# Altium PCB XIAO-HAT.PcbDoc
Units mm, origin at the board's own origin, x right, y up, seen from the top; angles counter-clockwise.
Board outline 18 x 21 mm, 2 copper layers (Top Layer, Bottom Layer); 12 components, 18 nets, 46 pads, 6 vias.
Unrouted connection lines stored in the file: 9.
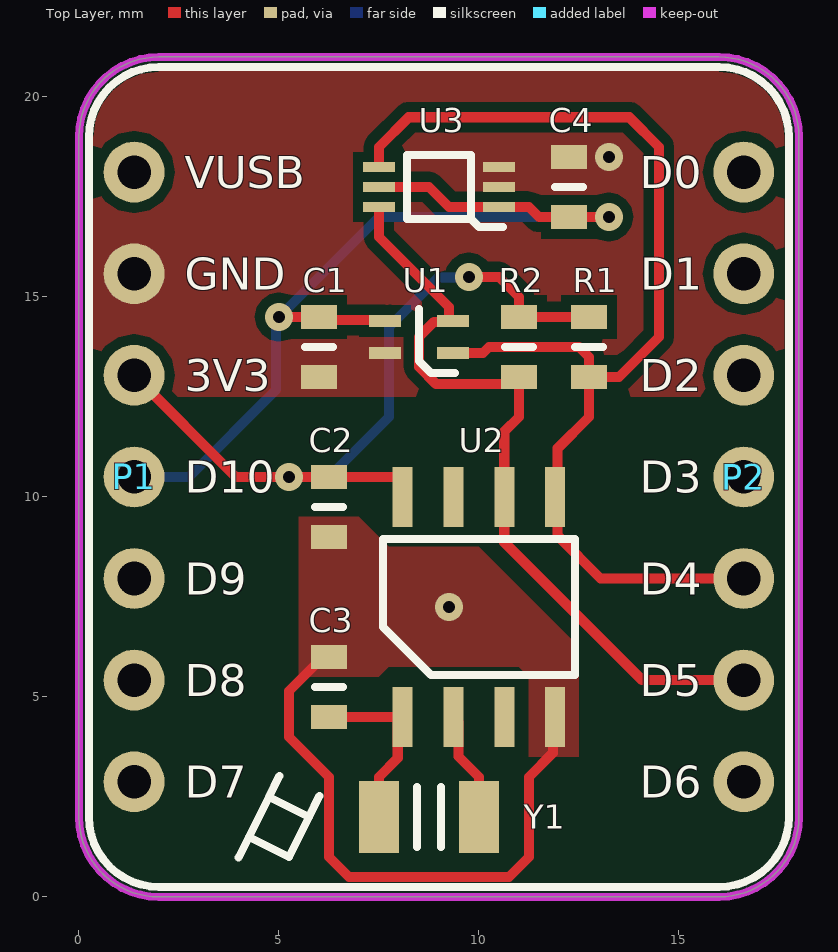
[diagram p0: Top Layer view]
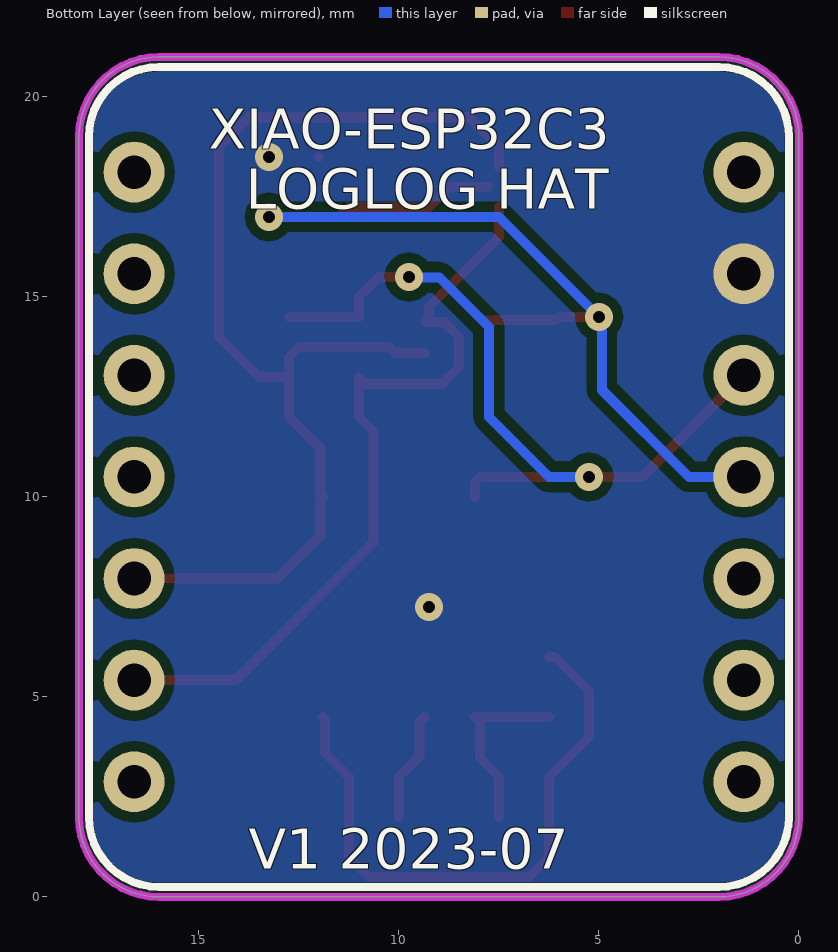
[diagram p1: Bottom Layer view, seen from below]
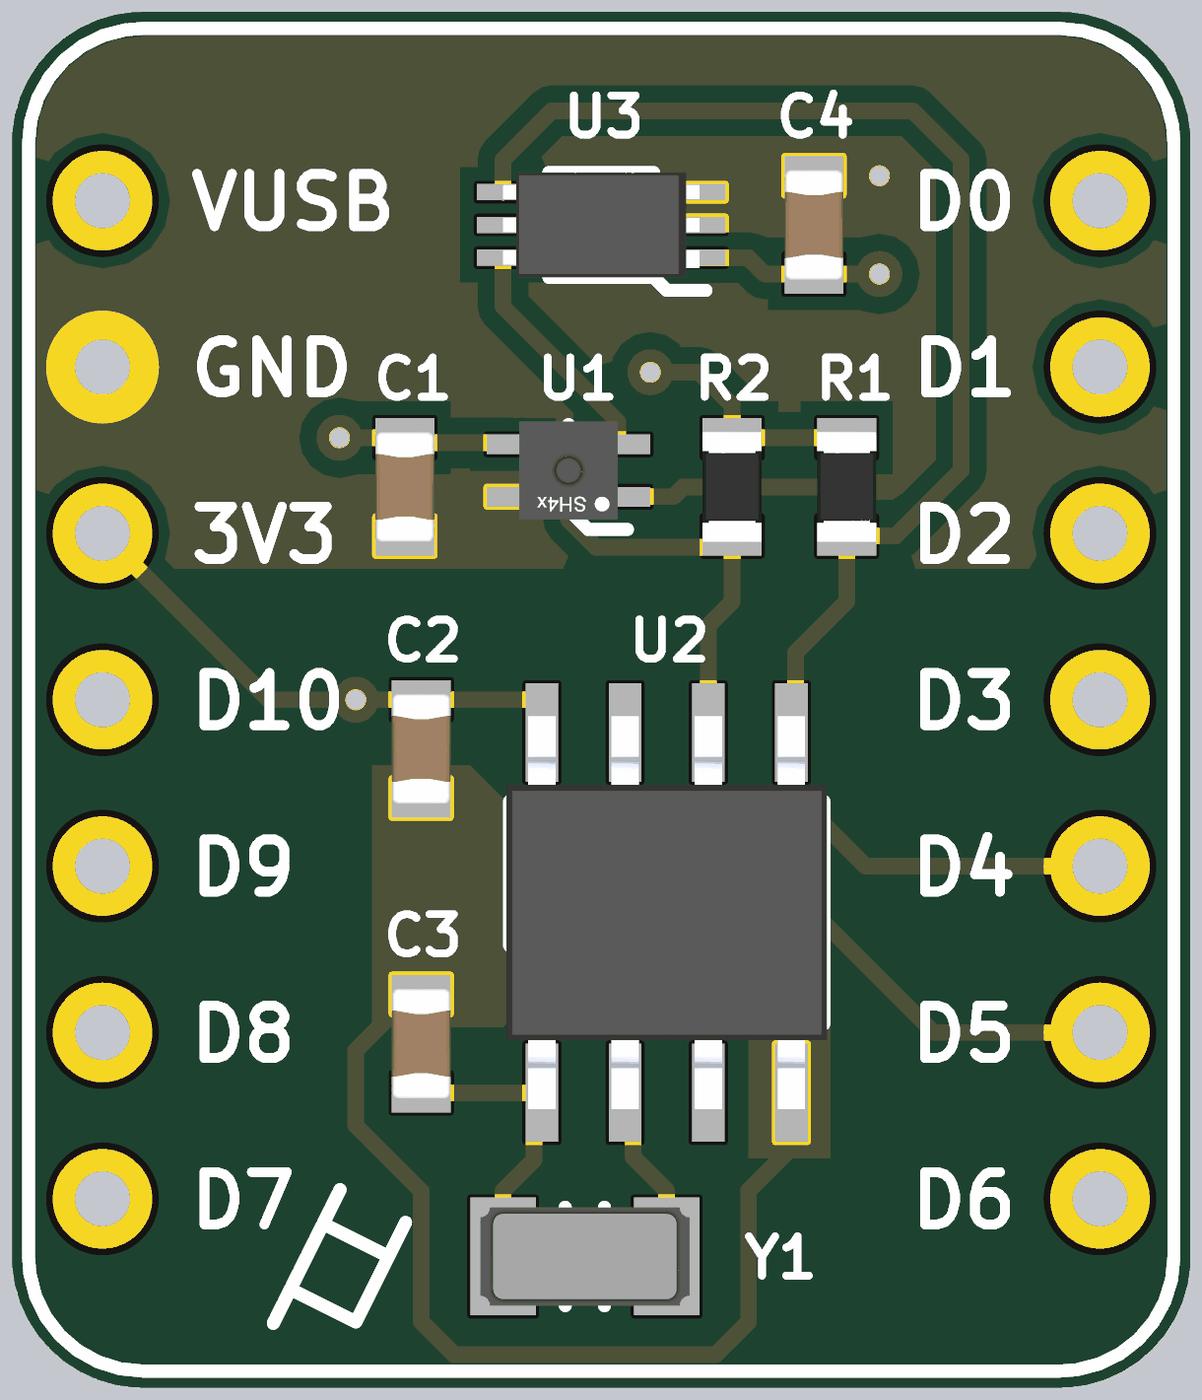
[diagram p2: 3D render of the assembled board from above, using the file's embedded part models]

## Layer stack, top to bottom
Top Solder: solder mask 0.0102, Solder Resist, Dk 3.5
Top Layer: signal copper 0.0356
Dielectric 1: dielectric 0.32, FR-4, Dk 4.8
Bottom Layer: signal copper 0.0356
Bottom Solder: solder mask 0.0102, Solder Resist, Dk 3.5

## Board outline
0,2 ccw(c2,2) 2,0 16,0 ccw(c16,2) 18,2 18,19 ccw(c16,19) 16,21 2,21 ccw(c2,19) 0,19

## Design rules (kind name [scope] priority, off if disabled: settings)
Clearance [All] p1: gap=0.254 ignorepadtopadclearanceinfootprint=FALSE except(0: Arc-Hole Track-Hole SMDPad-Hole THPad-Hole Via-Hole Fill-Hole Poly-Hole Region-Hole Text-Hole; 0.2: Arc-SMDPad Track-SMDPad SMDPad-SMDPad)
MinimumSolderMaskSliver [All] p1: minsoldermaskwidth=0.15
PlaneConnect [All] p1: planeconnectstyle=Direct reliefexpansion=0.508 reliefentries=4 reliefconductorwidth=0.254 reliefairgap=0.254
PolygonConnect [All] p1: connectstyle=Direct reliefconductorwidth=0.254 reliefentries=4 polygonreliefangle="90 Angle" airgapwidth=0.254
RoomDefinition XIAO-HAT [InComponentClass('XIAO-HAT')] p1: confinementstyle=ConfineIn formatcopy=TRUE lockcomponents=FALSE outline -106.68,-83.185 -55.88,-83.185 -55.88,-57.785 -106.68,-57.785
RoutingVias [All] p1: holewidth=0.711 width=1.27 viastyle="Through Hole" minholewidth=0.711 minwidth=1.27 maxholewidth=0.711 maxwidth=1.27
SilkToSolderMaskClearance [IsPad] p1: minsilkscreentomaskgap=0.15 clearancetoexposedcopper=TRUE
SolderMaskExpansion [All] p1: expansion=0.102 istentingtop=FALSE
Width [All] p1: maxlimit=2 minlimit=0.2 preferedwidth=0.254 minimp=50.000000 maximp=50.000000 favimp=50.000000
27 further rules are at their usual default settings.

## Classes and differential pairs
component class XIAO-HAT: C1 C2 C3 P1 P2 R2 U1 U2 U3 Y1

## Components (designator, comment, footprint, x,y, rotation, side; value= is the part's Value field where it differs from the comment)
C1 "Capacitor" 0603C 6,13.75 r270 top value=100n
C2 "Capacitor" 0603C 6.25,9.75 r270 top value=100n
C3 "Capacitor" 0603C 6.25,5.25 r90 top value=22p
C4 "Capacitor" 0603C 12.25,17.75 r90 top value=100n
P1 "7x2.54mm" 7P-2.54mm-0.84 1.38,10.5 r270 top locked
P2 "7x2.54mm" 7P-2.54mm-0.84 16.62,10.5 r270 top locked
R1 "Resistor" 0603R 12.75,13.75 r90 top value=10K
R2 "Resistor" 0603R 11,13.75 r90 top value=10K
U1 "SHT40" DFN-4-EP(1.5x1.5) 8.5,14 r180 top
U2 "PCF8563" SOP-8 10,7.25 r0 top
U3 "BH1750FVI" WSOF6 9,17.75 r180 top
Y1 "Oscillator" FC135 8.75,2 r180 top value=32.768kHz

## Footprints (in the part's own frame and the unit in brackets; to place one, negate y for a bottom-side part, rotate by r counter-clockwise, add the part's x,y. Pads: shape width x height; smd on the part's side, far side on the other; paste and mask are expansions set on the pad)
7P-2.54mm-0.84 [mm] "7-pin 2.54mm thru hole general footprint"
  round 1.52 hole 0.84: 1(-7.62,0) 2(-5.08,0) 3(-2.54,0) 4(0,0) 5(2.54,0) 6(5.08,0) 7(7.62,0)
0603C [mm] "0603/1608 SMD general footprint"
  rect 0.6x0.9 smd mask+0.05: 1(-0.75,0) 2(0.75,0)
  silkscreen extent 0,-0.35 0,0.35, body extent -0.85,-0.45 0.85,0.45, height 0.9
0603R [mm] "0603/1608 SMD general footprint"
  rect 0.6x0.9 smd mask+0.05: 1(-0.75,0) 2(0.75,0)
  silkscreen extent 0,-0.35 0,0.35, body extent -0.85,-0.45 0.85,0.45, height 0.55
DFN-4-EP(1.5x1.5) [mm]
  rect 0.8x0.3 smd mask+0.05: 1(-0.85,0.4) 2(-0.85,-0.4) 3(0.85,-0.4) 4(0.85,0.4)
  silkscreen extent -0.9,-0.7 0,0.9, body extent -0.75,-0.75 0.75,0.75, height 0.56
FC135 [mm]
  rect 1x1.8 smd mask+0.05: 1(-1.25,0) 2(1.25,0)
  silkscreen extent -0.3,-0.75 0.3,0.75, body extent -1.6,-0.75 1.6,0.75, height 0.9
SOP-8 [mm] "General footprint for SOP-8 1.27mm pitch 6.2x5"
  rect 0.5x1.5 smd mask+0.05: 1(-1.905,-2.75) 2(-0.635,-2.75) 3(0.635,-2.75) 4(1.905,-2.75) 5(1.905,2.75) 6(0.635,2.75) 7(-0.635,2.75) 8(-1.905,2.75)
  silkscreen extent -2.4,-1.7 2.4,1.7, body extent -2.45,-3 2.45,3, height 1.75
WSOF6 [mm]
  rect 0.8x0.25 smd mask+0.05: 1(-1.5,0.5) 2(-1.5,0) 3(-1.5,-0.5) 4(1.5,-0.5) 5(1.5,0) 6(1.5,0.5)
  silkscreen extent -1.6,-0.8 0.8,1, body extent -1.5,-0.8 1.5,0.8, height 0.75

## Part data
C1 C2 C4: "Capacitor 100nF ±10% 50V", Component=CL05B104KB54PNC
C3: "Capacitor 22pF ±5% 50V", Component=0402CG220J500NT
P1 P2: library part "7-pins Header", "General 7-pin connection", Function="XIAO CON"
R1 R2: "Resistor 10kΩ ±1% 1/16W", Component=0402WGF1002TCE
  R1: Function="SDA pull-up"
  R2: Function="SCL pull-up"
U1: "SHT40 temperature and humidity sensor", Component=SHT40-AD1B-R2, Function="T&H sensor"
U2: library part RTC-8563, "IC real-time clock with alarm interrupt", Component=PCF8563T/5,518, Function=RTC
U3: library part BH1750, "Digital light sensor", Component=BH1750FVI, Function="lux sensor"
Y1: library part XO-2, "Crystal oscillator 32.768kHz 20ppm 12.5pF", Component=Q13FC1350000400, Function="RTC XO"

## Via types
v1: diameter 0.7, hole 0.3, Top Layer to Bottom Layer, tented both sides, 6 vias

## Nets (pads, with @x,y where several pads share a name; then routed paths per layer and width w, separated by ;. In a path a pad name is that pad's centre, name@x,y a point inside that pad or via, vN(x,y) a via of type N, cw(c..) or ccw(c..) an arc to the next point about the centre after c; other vN are vias at no path point)
3V3: C2.1 P1.3 R1.2 R2.2 U2.8 | length 19.8
  Top Layer w0.254: P1.3 3.92,10.5 v1(5.25,10.5) C2.1 7.972,10.5 8.095,10.377 U2.8 ; v1(9.75,15.5) 10.5,15.5 11,15 R2.2 R1.2
  Bottom Layer w0.254: v1(5.25,10.5) 6.25,10.5 7.75,12 7.75,14.25 8.987,15.487 9.737,15.487 v1(9.75,15.5)
CLK: U2.7
D0/A0: P2.1
D1/A1: P2.2
D2/A2: P2.3
D3/A3: P2.4
D4/SDA: P2.5 R1.1 U1.1 U2.5 U3.4 | length 28.5
  Top Layer w0.254: U3.4 7.5,18.75 8.242,19.492 13.758,19.492 14.5,18.75 14.5,14 13.5,13 R1.1 ; U1.1 10.1,13.6 10.25,13.75 12.5,13.75 12.75,13.5 R1.1 ; P2.5 13.04,7.96 11.968,9.032 11.968,9.937 U2.5 11.968,10.063 11.968,11.218 12.75,12 R1.1
D5/SCL: P2.6 R2.1 U1.2 U2.6 U3.6 | length 19.9
  Top Layer w0.254: U3.6 7.5,16.5 9.25,14.75 9.25,14.423 9.273,14.4 U1.2 9.327,14.377 8.877,14.377 8.5,14 8.5,13.25 8.923,12.827 10.827,12.827 R2.1 11,12 10.635,11.635 U2.6 10.635,8.865 14.08,5.42 P2.6
D6/TX: P2.7
D7/RX: P1.7
D8/SCK: P1.6
D9/MISO: P1.5
D10/MOSI: C1.1 C4.1 P1.4 U1.3 U3.1 U3.5 | length 23.8
  Top Layer w0.254: v1(5,14.5) C1.1 6.077,14.423 7.627,14.423 U1.3 ; U3.5@7.773,17.75 8.75,17.75 9.25,17.25 U3.1 11.25,17.25 11.5,17 12,17 C4.1 v1(13.25,17) ; U1.3@7.777,14.423 U1.3@7.8,14.4
  Bottom Layer w0.254: P1.4 2.75,10.5 4.927,12.677 4.927,14.427 v1(5,14.5) 7.5,17 v1@13,17
GND: C1.2 C2.2 C3.2 C4.2 P1.2 U1.4 U2.4 U3.2 U3.3 | length 15.1
  Top Layer w0.254: C3.2 6.1,6 5.25,5.15 5.25,4 6.25,3 6.25,1 6.75,0.5 10.75,0.5 11.25,1 11.25,3 11.848,3.598 11.848,4.443 U2.4
  other v1: 9.25,7.25 13.25,18.5
INT: U2.3
NetC3_1: C3.1 U2.1 Y1.2 | length 4.6
  Top Layer w0.254: C3.1 7.972,4.5 U2.1 7.972,4.377 7.972,3.472 7.5,3 Y1.2
NetU2_2: U2.2 Y1.1 | length 2.8
  Top Layer w0.254: U2.2 9.488,4.377 9.488,3.512 10,3 Y1.1
VUSB: P1.1

## Polygon pours and split planes (outlines as drawn)
GND on Top Layer "GND_L01_P010" (solid, remove dead copper, pour order 10): 0,21 18,21 18,12.5 0,12.5
GND on Top Layer "GND_L01_P000" (solid, pour order 0): 5.5,9.5 7,9.5 7.75,8.75 10,8.75 12.5,6.25 12.5,3.5 11.25,3.5 11.25,5.5 11,5.75 7.75,5.75 7.5,5.5 5.5,5.5
GND on Bottom Layer "GND_L02_P009" (solid, pour order 9): 0,0 18,0 18,21 0,21

## Keep-outs
Keep-Out Layer:
  the board outline again, w0.2

## Silkscreen, mask and mechanical layers (free items; w line width, h text height)
Top Overlay:
  lines w0.2: 3.99,0.98 4.25,1.5 ; 5.01,3.02 4.75,2.5 ; 6.01,2.52 5.75,2 ; 4.25,1.5 4.75,2.5 ; 4.25,1.5 5.25,1 5.75,2 ; 4.75,2.5 5.75,2 ; 0.25,2 ccw(c2,2) 2,0.25 16,0.25 ccw(c16,2) 17.75,2 17.75,19 ccw(c16,19) 16,20.75 2,20.75 ccw(c2,19) 0.25,19 0.25,2
  text "VUSB" at 2.65,17.72 h0.8
  text "D0" at 14.017,17.72 h0.8
  text "GND" at 2.65,15.18 h0.8
  text "D1" at 14.034,15.18 h0.8
  text "3V3" at 2.65,12.64 h0.8
  text "D2" at 14.017,12.64 h0.8
  text "D10" at 2.65,10.1 h0.8
  text "D3" at 14.017,10.1 h0.8
  text "D9" at 2.65,7.56 h0.8
  text "D4" at 14.017,7.56 h0.8
  text "D8" at 2.65,5.02 h0.8
  text "D5" at 14.017,5.02 h0.8
  text "D7" at 2.65,2.48 h0.8
  text "D6" at 14.017,2.48 h0.8
Bottom Overlay:
  lines w0.2: 0.25,2 ccw(c2,2) 2,0.25 16,0.25 ccw(c16,2) 17.75,2 17.75,19 ccw(c16,19) 16,20.75 2,20.75 ccw(c2,19) 0.25,19 0.25,2
  text "XIAO-ESP32C3" at 14.748,18.7 h1
  text "LOGLOG HAT" at 13.832,17.2 h1
  text "V1 2023-07" at 13.748,0.7 h1